# Altium PCB ble_seismometer.PcbDoc
Units mil, origin at the board's own origin, x right, y up, seen from the top; angles counter-clockwise.
Board outline 6000 x 4000 mil, 2 copper layers (Top Layer, Bottom Layer); 24 components, 21 nets, 108 pads, 0 vias.
Unrouted connection lines stored in the file: 14.
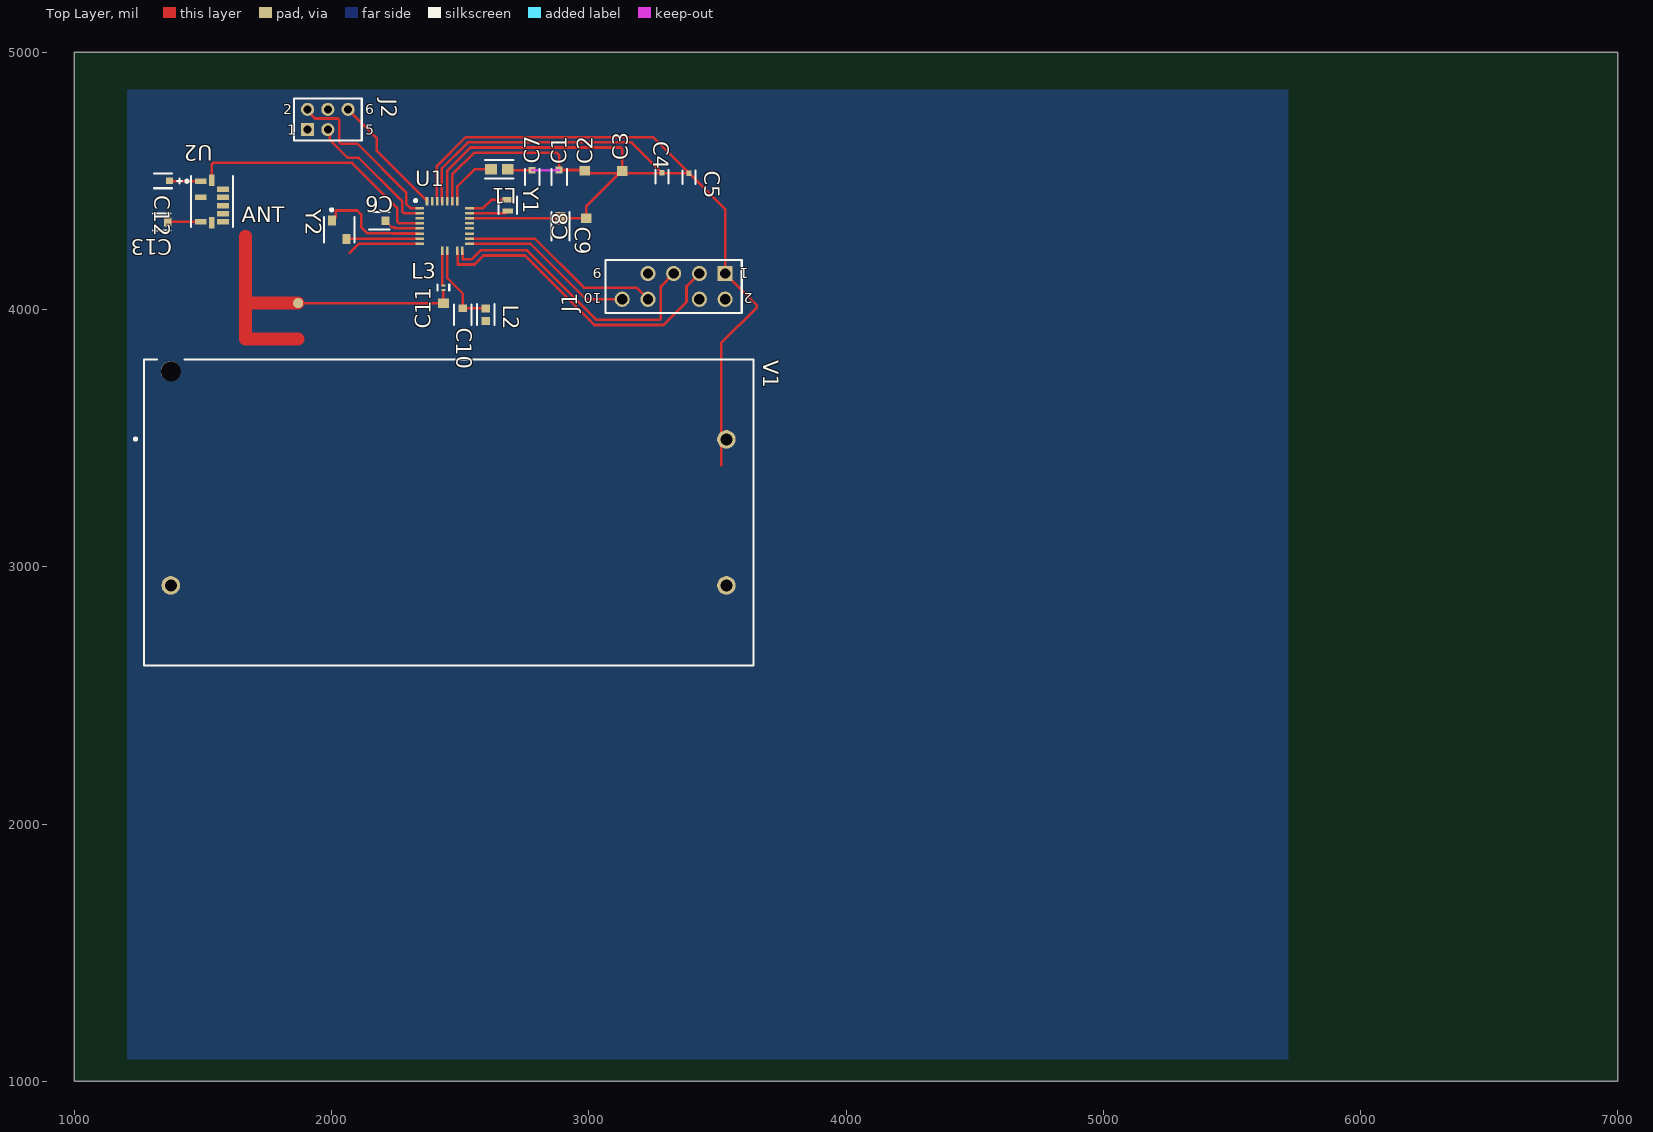
[diagram p0: Top Layer view]
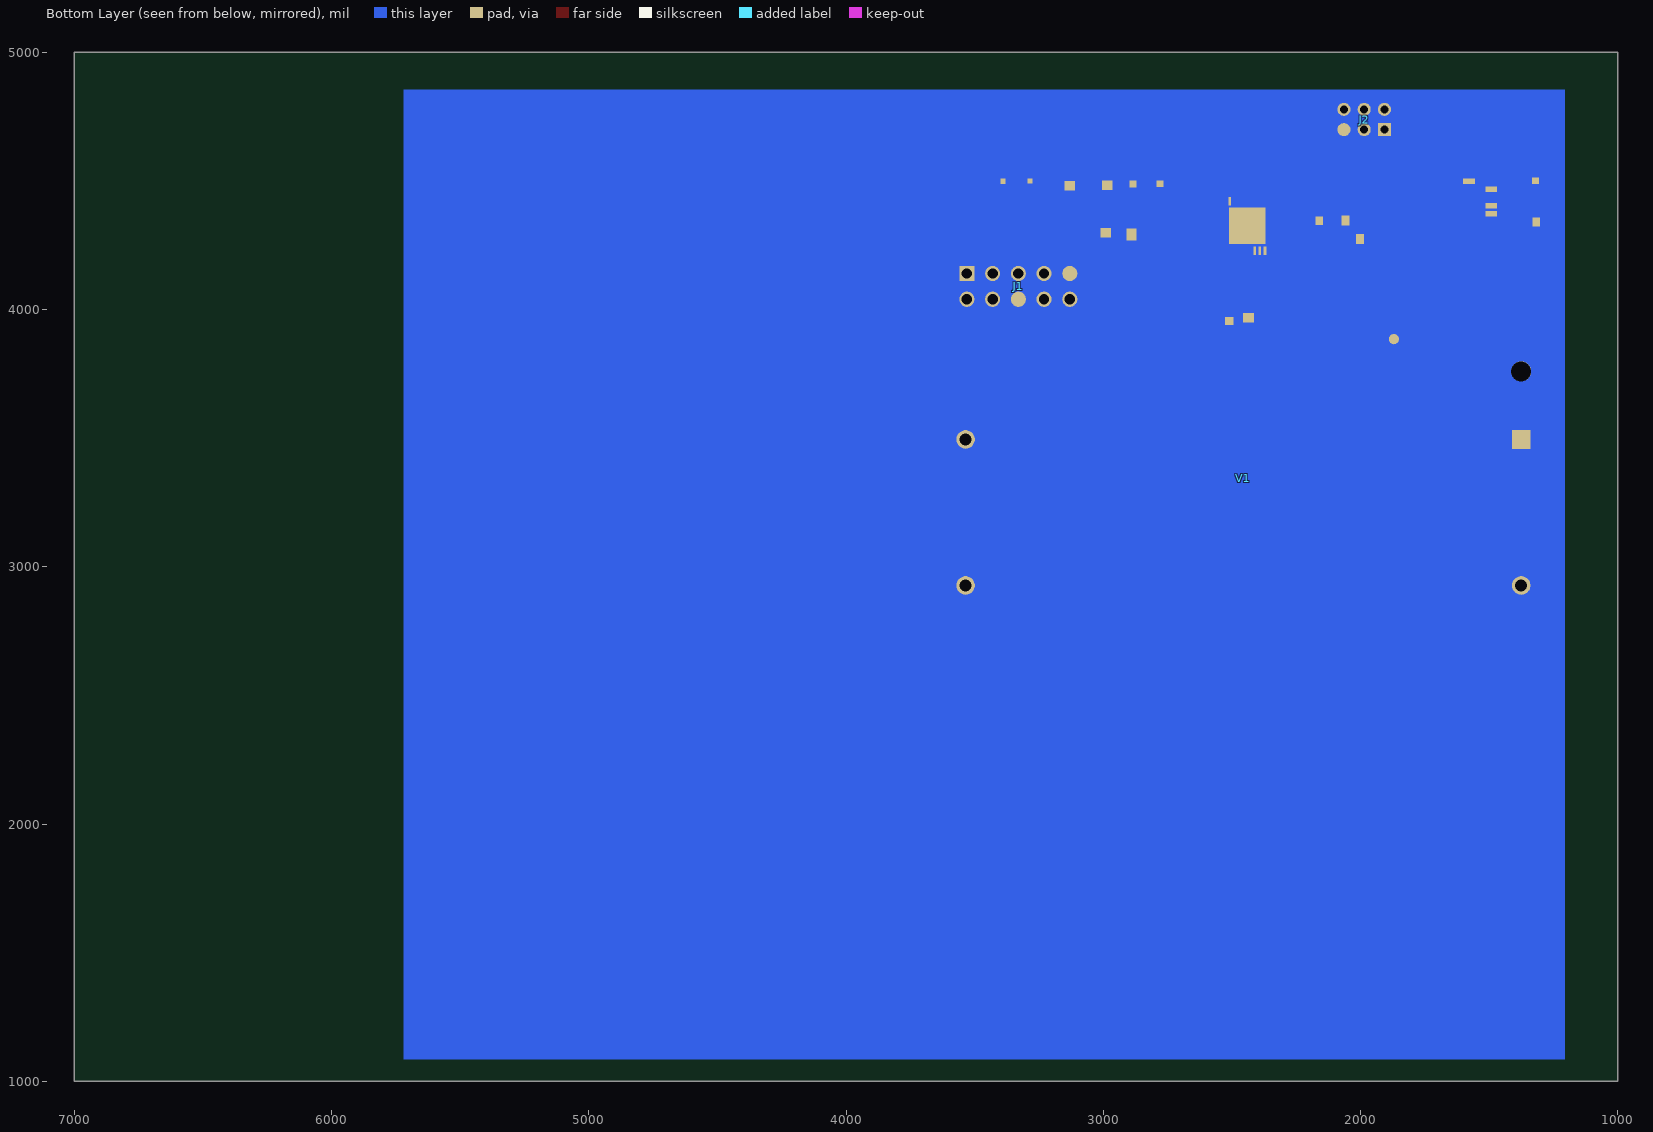
[diagram p1: Bottom Layer view, seen from below]
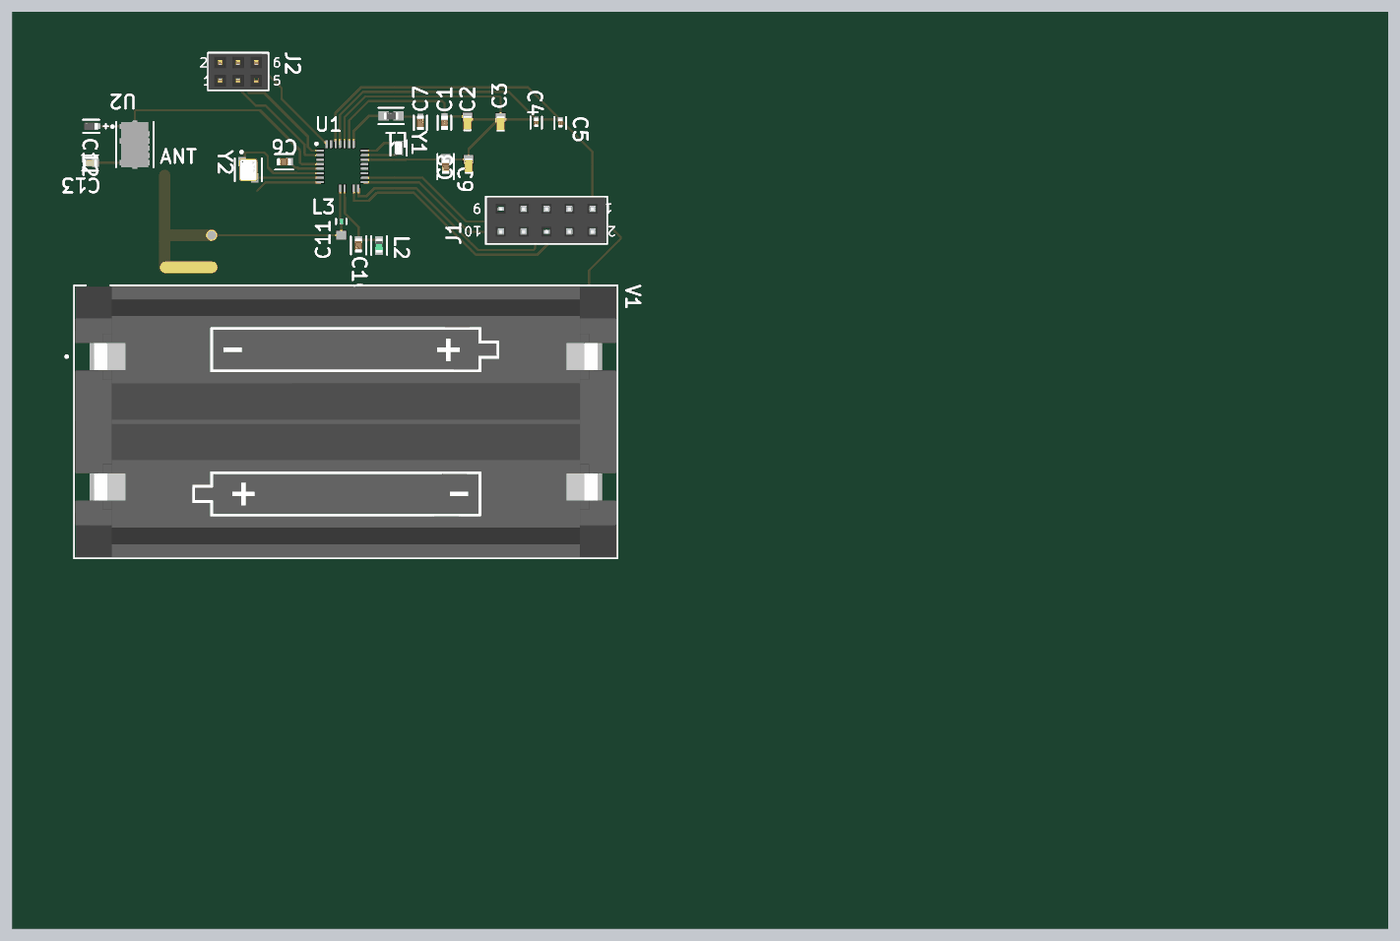
[diagram p2: 3D render of the assembled board from above, using the file's embedded part models]

## Layer stack, top to bottom
Top Solder: solder mask 0.4, Solder Resist, Dk 3.5
Top Layer: signal copper 1.4
Dielectric 1: dielectric 12.6, FR-4, Dk 4.8
Bottom Layer: signal copper 1.4
Bottom Solder: solder mask 0.4, Solder Resist, Dk 3.5

## Board outline
1000,1000 7000,1000 7000,5000 1000,5000

## Design rules (kind name [scope] priority, off if disabled: settings)
Clearance [All] p1: gap=10 ignorepadtopadclearanceinfootprint=FALSE except(0: Arc-Hole Track-Hole SMDPad-Hole THPad-Hole Via-Hole Fill-Hole Poly-Hole Region-Hole Text-Hole)
PolygonConnect [All] p1: connectstyle=Relief reliefconductorwidth=10 reliefentries=4 polygonreliefangle="90 Angle" airgapwidth=10
RoomDefinition ble_seismometer [InComponentClass('ble_seismometer')] p1: confinementstyle=ConfineIn formatcopy=TRUE lockcomponents=FALSE outline 1175,2525 3790,2525 3790,4945 1175,4945
RoutingVias [All] p1: holewidth=28 width=50 viastyle="Through Hole" minholewidth=28 minwidth=50 maxholewidth=28 maxwidth=50
SolderMaskExpansion [All] p1: expansion=4 istentingtop=FALSE
Width [All] p1: maxlimit=10 minlimit=10 preferedwidth=10
30 further rules are at their usual default settings.

## Components (designator, comment, footprint, x,y, rotation, side; value= is the part's Value field where it differs from the comment)
ANT "Inverted F Antenna" InvertedF-FOOTPRINT 1870,3885 r90 top net-tie
C1 "C1608X5R1A106K080AC" FP-C1608-080-0_1-MFG 2885,4515 r90 top
C2 "GRM188R71H104KA93D" CAPC1608X90X35ML10T15 2985,4511.46 r90 top
C3 "GRM188R71H104KA93D" CAPC1608X90X35ML10T15 3130,4510 r90 top
C4 "C0402C105K8PACTU" FP-C0402C105K8PACTU-MFG 3285,4515.75 r270 top
C5 "C0402C105K8PACTU" FP-C0402C105K8PACTU-MFG 3390,4514.25 r270 top
C6 "GRM188R71E224KA88D" FP-GRM188-0_1-e0_2_0_5-IPC_C 2185.33,4345 r180 top
C7 "GRM188R60J475KE19D" FP-GRM188-0_1-MFG 2780,4515 r90 top
C8 "GRM188R71H103KA01D" CAPC1608X90X35ML10T15 2990,4326.46 r90 top
C9 "GRM188R60J106ME47D" FP-GRM188-0_1-e0_2_0_55-IPC_A 2890,4323.43 r270 top
C10 "GRM188R71E224KA88D" FP-GRM188-0_1-e0_2_0_5-IPC_C 2510.33,3980.33 r270 top
C11 "VJ0603D1R5BXPAJ" CAPC1608X92X38ML15T08 2435,3996.46 r90 top
C12 "F981E105MMA" FP-F98M-MFG 1345,4500 r0 top value=1uF
C13 "C0603C104K5RACTU" FP-C0603C-CF-MFG 1340,4340 r180 top value="0.10 μF"
J1 "61301021821" 61301021821 3330,4090 r180 top
J2 "62000621821" 62000621821 1985.63,4738.74 r0 top
L1 "LQM18FN4R7M00D" FP-LQM18FN_00-IPC_A 2652.44,4545 r180 top
L2 "LQG18HN22NJ00D" FP-LQG18HH_00-IPC_C 2600,3980 r270 top
L3 "LQW03AW1N9C00D" FP-LQW03AW_00-MFG 2435,4085 r270 top
U1 "EFR32BG13P632F512GM32-D" EFR32BG13P632F512GM32-D 2440,4325 r0 top
U2 "ADXL345BCCZ-RL7" FP-CC-14-1-MFG 1535,4420 r0 top
V1 "1013" FP-1013-MFG 2455.08,3211.14 r0 top
Y1 "ABS05-32.768KHZ-T" FP-ABS05-MFG 2685,4405 r270 top
Y2 "ABM10-165-38.400MHZ-T3" FP-ABM10-165-MFG 2030,4310 r270 top

## Footprints (in the part's own frame and the unit in brackets; to place one, negate y for a bottom-side part, rotate by r counter-clockwise, add the part's x,y. Pads: shape width x height; smd on the part's side, far side on the other; paste and mask are expansions set on the pad)
61301021821 [mm] "Socket Header, Pitch 2.54 mm, THT, Vertical, dual row, 10p"
  rect 1.5x1.5 hole 1.02: 1(-5.08,-1.27)
  round 1.5 hole 1.02: 2(-5.08,1.27) 3(-2.54,-1.27) 4(-2.54,1.27) 5(0,-1.27) 7(2.54,-1.27) 8(2.54,1.27) 10(5.08,1.27)
  round 1.5 smd far side: 6(0,1.27) 9(5.08,-1.27)
  silkscreen extent -6.73,-2.62 6.73,2.62, body extent -6.6,-2.54 6.6,2.54, height 8.45
62000621821 [mm] "Socket Header, Pitch 2.00 mm, THT, Vertical, dual row, 6p"
  rect 1.3x1.3 hole 0.8: 1(-2,-1)
  round 1.3 hole 0.8: 2(-2,1) 3(0,-1) 4(0,1) 6(2,1)
  round 1.3 smd far side: 5(2,-1)
  silkscreen extent -3.35,-2.07 3.35,2.07, body extent -3.3,-2 3.3,2, height 4.35
CAPC1608X90X35ML10T15 [mm] "Chip Capacitor, 2-Leads, Body 1.7x0.9mm, IPC Low Density"
  rect 0.95x1.05 smd far side: 1(-0.725,0)
  rect 0.95x1.05 smd: 2(0.725,0)
  body extent -0.85,-0.45 0.85,0.45, height 0.9
CAPC1608X92X38ML15T08 [mm] "Chip Capacitor, 2-Leads, Body 1.60x0.80mm, IPC Low Density"
  rect 0.95x1.1 smd far side: 1(-0.725,0)
  rect 0.95x1.1 smd: 2(0.725,0)
  body extent -0.87,-0.48 0.87,0.47, height 0.92
EFR32BG13P632F512GM32-D [mm]
  rect 0.85x0.25 smd: 1(-2.45,1.75) 2(-2.45,1.25) 3(-2.45,0.75) 4(-2.45,0.25) 5(-2.45,-0.25) 6(-2.45,-0.75) 7(-2.45,-1.25) 8(-2.45,-1.75) 17(2.45,-1.75) 18(2.45,-1.25) 19(2.45,-0.75) 20(2.45,-0.25) 21(2.45,0.25) 22(2.45,0.75) 23(2.45,1.25) 24(2.45,1.75)
  rect 0.25x0.85 smd far side: 9(-1.75,-2.45) 10(-1.25,-2.45) 11(-0.75,-2.45) 25(1.75,2.45)
  rect 3.6x3.6 smd far side: 11(0,0)
  rect 0.25x0.85 smd: 12(-0.25,-2.45) 13(0.25,-2.45) 15(1.25,-2.45) 16(1.75,-2.45) 26(1.25,2.45) 27(0.75,2.45) 28(0.25,2.45) 29(-0.25,2.45) 30(-0.75,2.45) 31(-1.25,2.45) 32(-1.75,2.45)
  rect 0.25x0.85 on Mech1: 14(0.75,-2.45)
  silkscreen extent -3,2.38 -2.75,2.62
FP-1013-MFG [mm]
  rect 1.84x1.84 smd far side paste-1000 mask+0: 1(-27.43,7.21)
  round 1.84 hole 1.19 paste-1000 mask+0: 2(27.43,7.21) 3(-27.43,-7.21) 4(27.43,-7.21)
  round 1.98 hole 1.98 unplated paste-1000 mask+0: ""(-27.43,13.94)
  silkscreen extent -31.04,-15.11 30.09,15.11, body extent -30.19,-15.21 30.19,15.21, height 0.25
FP-ABM10-165-MFG [mm]
  rect 1x0.8 smd paste+0 mask+0: 1(-0.9,-0.7) 3(0.9,0.7)
  rect 1x0.8 smd far side paste+0 mask+0: 2(0.9,-0.7) 4(-0.9,0.7)
  silkscreen extent -2.1,-1.5 1.25,1.5, body extent -1.5,-1.2 1.5,1.2, height 0.25
FP-ABS05-MFG [mm]
  rect 0.5x1 smd paste+0 mask+0: 1(-0.55,0) 2(0.55,0)
  silkscreen extent -0.85,-0.9 0.85,0.9, body extent -0.95,-0.65 0.95,0.65, height 0.25
FP-C0402C105K8PACTU-MFG [mm]
  rect 0.52x0.52 smd paste+0 mask+0: 1(-0.4,0)
  rect 0.52x0.52 smd far side paste+0 mask+0: 2(0.4,0)
  silkscreen extent -0.67,-0.64 0.67,0.64, body extent -0.8,-0.4 0.8,0.4, height 0.25
FP-C0603C-CF-MFG [mm]
  rect 0.75x0.9 smd paste+0 mask+0: 1(-0.6,0)
  rect 0.75x0.9 smd far side paste+0 mask+0: 2(0.6,0)
  silkscreen extent -0.87,-0.85 0.88,0.85, body extent -1.2,-0.6 1.2,0.6, height 0.25
FP-C1608-080-0_1-MFG [mm]
  rect 0.7x0.7 smd far side paste+0 mask+0: 1(-0.7,0)
  rect 0.7x0.7 smd paste+0 mask+0: 2(0.7,0)
  silkscreen extent -0.8,-0.75 0.8,0.75, body extent -1.15,-0.55 1.15,0.55, height 0.25
FP-CC-14-1-MFG [mm]
  rect 1.145x0.55 smd paste+0 mask+0: 1(-1.098,2) 3(-1.098,0.4) 6(-1.098,-2) 8(1.098,-2) 9(1.098,-1.2) 10(1.098,-0.4) 11(1.098,0.4) 12(1.098,1.2)
  rect 1.145x0.55 smd far side paste+0 mask+0: 2(-1.098,1.2) 4(-1.098,-0.4) 5(-1.098,-1.2) 13(1.098,2)
  rect 0.55x1.145 smd paste+0 mask+0: 7(0,-2.097) 14(0,2.097)
  silkscreen extent -2.6,-2.5 2.07,2.5, body extent -2.17,-3.17 2.17,3.17, height 0.25
FP-F98M-MFG [mm]
  rect 0.7x0.65 smd far side paste+0 mask+0: 1(-0.65,0)
  rect 0.7x0.65 smd paste+0 mask+0: 2(0.65,0)
  silkscreen extent -0.9,-0.72 1.88,0.72, body extent -1.1,-0.63 1.1,0.63, height 0.25
FP-GRM188-0_1-e0_2_0_5-IPC_C [mil]
  rect 29.87x31.97 smd paste+0 mask+0: 1(-24.67,0)
  rect 29.87x31.97 smd far side paste+0 mask+0: 2(24.67,0)
  silkscreen extent -40,-33 40,33, body extent -44,-22 44,22, height 10
FP-GRM188-0_1-e0_2_0_55-IPC_A [mil]
  rect 47.57x39.85 smd paste+0 mask+0: 1(-31.57,0)
  rect 47.57x39.85 smd far side paste+0 mask+0: 2(31.57,0)
  silkscreen extent -55,-36 55,36, body extent -75,-40 75,40, height 10
FP-GRM188-0_1-MFG [mm]
  rect 0.65x0.7 smd far side paste+0 mask+0: 1(-0.675,0)
  rect 0.65x0.7 smd paste+0 mask+0: 2(0.675,0)
  silkscreen extent -0.8,-0.72 0.8,0.72, body extent -1.1,-0.55 1.1,0.55, height 0.25
FP-LQG18HH_00-IPC_C [mil]
  rect 31.73x33.79 smd paste+0 mask+0: 1(-24.65,0) 2(24.65,0)
  silkscreen extent -41,-34 41,34, body extent -44,-23 44,23, height 10
FP-LQM18FN_00-IPC_A [mil]
  rect 45.6x39.85 smd paste+0 mask+0: 1(-32.56,0) 2(32.56,0)
  silkscreen extent -55,-36 55,36, body extent -75,-40 75,40, height 10
FP-LQW03AW_00-MFG [mm]
  rect 0.21x0.4 smd paste+0 mask+0: 1(-0.22,0) 2(0.22,0)
  silkscreen extent -0.29,-0.58 0.29,0.58, body extent -0.43,-0.33 0.43,0.33, height 0.25
InvertedF-FOOTPRINT [mil]
  round 40 smd far side: 1(0,0)
  round 40 smd: 2(140,0)
  Top Layer lines w50: 0,205 400,205 ; 0,200 0,0 ; 140,200 140,0

## Part data
ANT: library part InvertedF
C1: library part CMP-2000-04979-3, "Multilayer Ceramic Capacitors 10μF ±10% 10V X5R SMD 0603", Capacitance=10uF, Case Code (Imperial)=0603, Case Code (Metric)=1608, Dielectric=X5R, Dielectric Material=Ceramic, Max Operating Temperature=85°C, Min Operating Temperature=-55°C, Package Quantity=1, Tolerance=10%, Voltage=10V, Case/Package=0603, Construction=Flat, Depth=0.8mm, Height=0.8mm, Lead Free="Lead Free", Length=1.6mm, Mount="Surface Mount", Number of Pins=2, Packaging="Tape and Reel", Radiation Hardening=No, REACH SVHC="No SVHC", Resistor Type=Ceramic, RoHS Compliant=Yes, Series=C, Termination=SMD/SMT, Thickness=0.035inch, Voltage Rating=10V, Voltage Rating (DC)=10V, Weight=7.1E-05oz, Width=0.8mm
C2 C3: library part CMP-2100-03643-1, "Chip Capacitor, 0.1 uF, +/- 10%, 50 V, -55 to 125 degC, 0603 (1608 Metric), RoHS, Tape and Reel", Capacitance=100nF, Case Code (Imperial)=0603, Case Code (Metric)=1608, Dielectric=X7R, Dielectric Material=Ceramic, Insulation Resistance=10GR, Manufacturer=Murata, Max Operating Temperature=125degC, Min Operating Temperature=-55degC, Package Description="2-Pin Surface Mount Device, Body 1.6 x 0.8 mm", Package Quantity=1, Tolerance=10%, Voltage=50V, Case/Package=0603, Contact Plating=Tin, Datasheet URL=http://psearch.en.murata.com/capacitor/product/GRM188R71H104KA93%23.pdf, Datasheet Version=42675.0, Depth=0.8mm, Height=0.8mm, Lead Free=LeadFree, Length=1.6mm, Manufacturer URL=http://www.murata.com/, Material=Ceramic, Mount=SurfaceMount, Number of Pins=2, Package Reference=0603, Packaging=TapeandReel, Radiation Hardening=No, REACH SVHC=NoSVHC, RoHSCompliant=true, Termination=SMD/SMT, Thickness=0.035inch, Voltage Rating=50V, Voltage Rating (DC)=50V, Width=0.8mm
C4 C5: library part CMP-2008-02081-2, "CAP CER 1UF 10V X5R 0402", Capacitance=1uF, Case Code (Imperial)=0402, Case Code (Metric)=1005, Dielectric=X5R, Dielectric Material=Ceramic, Max Operating Temperature=85°C, Min Operating Temperature=-55°C, Package Quantity=1, Tolerance=10%, Voltage=10V, Case/Package=0402, Construction=Flat, Contact Plating=Tin, Depth=0.5mm, Dissipation Factor=5%, Height=0.5mm, Lead Free="Lead Free", Length=1mm, Mount="Surface Mount", Number of Pins=2, Packaging="Tape and Reel", Radiation Hardening=No, REACH SVHC="No SVHC", RoHS Compliant=Yes, Series=C, Termination=SMD/SMT, Thickness=0.022inch, Voltage Rating=10V, Voltage Rating (DC)=10V, Width=0.5mm
C6 C10: library part CMP-1035-02648-3, "Chip Multilayer Ceramic Capacitors for General Purpose, 0603, 0.22uF, X7R, 15%, 10%, 25V", Capacitance=220nF, Case Code (Imperial)=0603, Case Code (Metric)=1608, Dielectric=X7R, Max Operating Temperature=125°C, Min Operating Temperature=-55°C, Package Quantity=1, Tolerance=10%, Voltage=50V, Voltage Rating=25V, Case/Package=0603, Depth=0.8mm, Height=0.8mm, Lead Free="Lead Free", Length=1.6mm, Material=Ceramic, Mount="Surface Mount", Number of Pins=2, Packaging="Tape and Reel", Radiation Hardening=No, REACH SVHC="No SVHC", Termination=SMD/SMT, Thickness=0.035inch, Voltage Rating (DC)=25V, Width=0.8mm
C7: library part CMP-2006-02799-3, "CAP CER 4.7UF 6.3V X5R 0603", Capacitance=4.7uF, Case Code (Imperial)=0603, Case Code (Metric)=1608, Dielectric=X5R, Max Operating Temperature=85°C, Min Operating Temperature=-55°C, Package Quantity=1, Tolerance=10%, Voltage=6.3V, Case/Package=0603, Depth=0.8mm, Height=0.8mm, Lead Free="Lead Free", Length=1.6mm, Material=Ceramic, Mount="Surface Mount", Packaging="Tape and Reel", Radiation Hardening=No, REACH SVHC="No SVHC", RoHS Compliant=Yes, Termination=SMD/SMT, Thickness=0.035inch, Voltage Rating=6.3V, Voltage Rating (DC)=6.3V, Width=0.8mm
C8: library part CMP-2100-03642-1, "Chip Capacitor, 10 nF, +/- 10%, 50 V, -55 to 125 degC, 0603 (1608 Metric), RoHS, Tape and Reel", Capacitance=10nF, Case Code (Imperial)=0603, Case Code (Metric)=1608, Dielectric=X7R, Dielectric Material=Ceramic, Insulation Resistance=10GR, Manufacturer=Murata, Max Operating Temperature=125degC, Min Operating Temperature=-55degC, Package Description="2-Pin Surface Mount Device, Body 1.6 x 0.8 mm", Package Quantity=1, Tolerance=10%, Voltage=50V, Case/Package=0603, Datasheet URL=http://search.murata.co.jp/Ceramy/image/img/A01X/G101/ENG/GRM188R71H103KA01-01.pdf, Datasheet Version=42401.0, Depth=0.8mm, Height=0.8mm, Lead Free=LeadFree, Length=1.6mm, Manufacturer URL=http://www.murata.com/, Material=Ceramic, Mount=SurfaceMount, Number of Pins=2, Package Reference=0603, Packaging=TapeandReel, REACH SVHC=Unknown, RoHSCompliant=True, Termination=SMD/SMT, Thickness=0.035inch, Voltage Rating=50V, Voltage Rating (DC)=50V, Width=0.031inch
C9: library part CMP-2006-02792-2, "Chip Multilayer Ceramic Capacitors for General Purpose, 0603, 10uF, X5R, 15%, 20%, 6.3V", Capacitance=10uF, Case Code (Imperial)=0603, Case Code (Metric)=1608, Dielectric=X5R, Max Operating Temperature=85°C, Min Operating Temperature=-55°C, Package Quantity=4000, Tolerance=20%, Voltage=6.3V, Case/Package=0603, Depth=0.8mm, Height=0.8mm, Lead Free="Lead Free", Length=1.6mm, Material=Ceramic, Mount="Surface Mount", Packaging="Tape and Reel", Radiation Hardening=No, REACH SVHC="No SVHC", Termination=SMD/SMT, Thickness=0.035inch, Voltage Rating=6.3V, Voltage Rating (DC)=6.3V, Width=0.031inch
C11: library part CMP-2006-01499-1, Manufacturer=Vitramon, Part Number=VJ0603D1R5BXPAJ
C12: library part CMP-04424-000025-1, "CAP TANT 1UF 20% 25V 0603", Capacitance=1uF, Leakage Current=0.5uA, Manufacturer=AVX, Package=F98M, Ripple Current=50mA, Temperature="-55°C to +125°C", Temperature Coefficient=30%, Temperature Range High=+125°C, Temperature Range Low=-55°C, Tolerance=20%, Voltage Rating=25V, Automotive=No, Category=Cap, ComponentLink2Description=Datasheet, ComponentLink2URL=http://datasheets.avx.com/F98.pdf, Device Class L1="Passive Components", Device Class L2=Capacitors, Device Class L3="Tantalum Capacitors", Digikey Description="CAP TANT 1UF 20% 25V 0603", Dissipation Factor=8%, Esr=10Ω, Footprint Url=https://www.avx.com/download/software/literature/AVX-Footprint-Library.pdf, Height=0.9mm, Lead Free=Yes, Life=1000Hours, Manufacturer Part Number=F981E105MMA, Material=Tantalum, Mouser Description="Tantalum Capacitors - Solid SMD 1uF 25V 20% 0603,1.6x0.85x0.65mm", Octopart=https://octopart.com/f981e105mma-avx-27552246, RoHS=TRUE
C13: library part CMP-2006-03061-2, "CAP CER 0.1UF 50V X7R 0603", Capacitance="0.10 μF", Manufacturer=KEMET, Package=C0603C-CF, Temperature="-55°C to +125°C", Temperature Characteristic=X7R, Temperature Coefficient=30ppm/°C, Temperature Range High=+125°C, Temperature Range Low=-55°C, Tolerance=0.1, Voltage Rating="50 V", Automotive=Yes, Automotive Grade="Grade 1", Category=Cap, ComponentLink2Description=Datasheet, ComponentLink2URL=https://api.kemet.com/component-edge/download/datasheet/C0603C100J5GACAUTO.pdf, Device Class L1="Passive Components", Device Class L2=Capacitors, Device Class L3="Ceramic Capacitors", Digikey Description="CAP CER 0.1UF 50V X7R 0603", Height=0.87mm, Lead Free=Yes, Manufacturer Part Number=C0603C104K5RACTU, Material=Ceramic, Octopart=https://octopart.com/c0603c104k5ractu-kemet-139244, RoHS=TRUE
J1: library part CMP-1502-01334-1, "THT Vertical Socket Header WR-PHD, Pitch 2.54 mm, Dual Row, 10 pins", Contact Resistance=20mOhm, Manufacturer="Wurth Elektronik", Operating Temperature=-40to125degC, Rated Current=3A, Withstanding Voltage=500VAC, Working Voltage=250VAC, Datasheet URL=https://katalog.we-online.de/em/datasheet/6130xx21821.pdf, Gender=Female, Manufacturer URL=http://www.we-online.de, Mounting Technology=THT, Orientation=Vertical, Package Reference=61301021821, Packaging=Tray, Part Number=61301021821, Pin Number=10, Pitch=2.54mm, Publisher=WurthElektronik, Row Number=Dual
J2: library part CMP-1502-01207-1, "THT Vertical Socket Header WR-PHD, Pitch 2.00 mm, Dual Row, 6 pins", Contact Resistance=20mOhm, Manufacturer="Wurth Elektronik", Operating Temperature=-40to105degC, Rated Current=2A, Withstanding Voltage=500VAC, Working Voltage=250VAC, Datasheet URL=https://katalog.we-online.de/em/datasheet/62000621821.pdf, Gender=Female, Manufacturer URL=http://www.we-online.de, Mounting Technology=THT, Orientation=Vertical, Package Reference=62000621821, Packaging=Tube, Part Number=62000621821, Pin Number=6, Pitch=2.00mm, Publisher=WurthElektronik, Row Number=Dual
L1: library part CMP-06042-016387-1, "FIXED IND 4.7UH 80MA 600 MOHM", Case Code (Imperial)=0603, Case Code (Metric)=1608, Current Rating=80mA, DC Resistance (DCR)=600mR, Inductance=4.7uH, Max Operating Temperature=125°C, Min Operating Temperature=-55°C, Package Quantity=4000, Self Resonant Frequency=50MHz, Test Frequency=1MHz, Tolerance=20%, Case/Package=0603, Core Material=Ferrite, DC Current=80mA, Depth=0.9mm, Height=0.8mm, Height - Seated (Max)=0.035inch, Lead Free="Lead Free", Length=1.6mm, Max DC Current=80mA, Military Standard=Not, Mount="Surface Mount", Packaging="Tape and Reel", Radiation Hardening=No, Rated Current-Max=80mA, RoHS Compliant=Yes, Saturation Current=80mA, Series=LQM18F, Shielding=Shielded, Termination=SMD/SMT, Weight=7.1E-05oz, Width=0.031inch
L2: library part CMP-06042-016460-1, "Multilayer type RF Inductor 22nH ±5% 0.5Ω 500mA 0603", Case Code (Imperial)=0603, Case Code (Metric)=1608, Current Rating=300mA, DC Resistance (DCR)=500mR, Inductance=22nH, Inductance Tolerance=5%, Max Operating Temperature=85°C, Min Operating Temperature=-40°C, Package Quantity=4000, Self Resonant Frequency=2.3GHz, Test Frequency=100MHz, Case/Package=0603, Core Material=Air, DC Current=300mA, Depth=0.95mm, Height=0.8mm, Height - Seated (Max)=0.037inch, Lead Free="Lead Free", Length=1.6mm, Max DC Current=300mA, Military Standard=Not, Mount="Surface Mount", Packaging="Tape and Reel", Q Factor=12, Radiation Hardening=No, REACH SVHC="No SVHC", RoHS Compliant=Yes, Series=LQG18H, Shielding=Unshielded, Termination=SMD/SMT, Tolerance=5%, Width=0.031inch
L3: library part CMP-06042-002256-1, "Wire Wound RF Inductor 1.9nH ±0.2nH 620mA 0.08Ω 0201 (0603)", Case/Package=Nonstandard, Current Rating=620mA, DC Resistance (DCR)=80mR, Inductance=1.9nH, Max Operating Temperature=125°C, Min Operating Temperature=-55°C, Resistor Type=Wirewound, Self Resonant Frequency=19GHz, Test Frequency=100MHz, Mount="Surface Mount", Packaging="Tape and Reel", Shielding=Unshielded
U1: "RF System on a Chip - SoC Blue Gecko BLE SoC QFN48 2.4 G 10 dB BLE/proprietary 512 kB 64 kB (RAM) 16GPIO", Manufacturer_Name="Silicon Labs", Mouser Part Number=634-BGP632F512GM32D, Datasheet Link=https://www.silabs.com/documents/public/data-sheets/efr32bg13-datasheet.pdf, Geometry.Height=0.9mm, Manufacturer_Part_Number=EFR32BG13P632F512GM32-D, Mouser Price/Stock=https://www.mouser.co.uk/ProductDetail/Silicon-Labs/EFR32BG13P632F512GM32-D?qs=EBDBlbfErPzhsDxvdSLfmw%3D%3D
U2: library part CMP-0885-00033-2, "ACCEL 2-16G I2C/SPI 14LGA", Case/Package=LGA, Max Operating Temperature=85°C, Max Supply Voltage=3.6V, Min Operating Temperature=-40°C, Min Supply Voltage=2V, Nominal Supply Current=140uA, Operating Supply Current=145uA, Package Quantity=1, -3db Bandwidth=1.6kHz, Axis="X, Y, Z", Bandwidth=0.05Hz, Depth=3mm, Lead Free="Contains Lead", Length=5mm, Number of Pins=14, Output Type=Digital, Packaging="Tape and Reel", Radiation Hardening=No, Sensitivity=256LSB/g
V1: library part CMP-19636-000024-1, "BATTERY HOLDER AA 2 CELL PC PIN", Color=Black, Max Operating Temperature=145°C, Min Operating Temperature=-50°C, Package Quantity=1, Contact Plating=Nickel, Lead Free="Lead Free", Material=Nylon, Mount="Through Hole", Number of Batteries=2, Number of Cells=2, Packaging=Tray, REACH SVHC="No SVHC", Series=-, Termination="PC Pin"
Y1: library part CMP-27762-008890-2, "Crystal 32.768kHz ±20ppm (Tol) 12.5pF FUND 90kΩ 2-Pin SMD T/R", Case/Package=CSMD, ESR (Equivalent Series Resistance)=90kR, Frequency=32.768kHz, Frequency Tolerance=20ppm, Load Capacitance=12.5pF, Max Operating Temperature=85°C, Min Operating Temperature=-40°C, Operating Frequency="32.768 kHz", Package Quantity=3000, Depth=1mm, Height=0.5mm, Lead Free="Lead Free", Length=1.6mm, Mount="Surface Mount", Number of Pins=2, Packaging="Tape and Reel", Radiation Hardening=No, REACH SVHC="No SVHC", RoHS Compliant=Yes, Series=ABS05, Series Resistance=90kR, Termination=SMD/SMT, Tolerance=20ppm, Width=1mm
Y2: library part CMP-27762-010013-1, "CRYSTAL 38.4000MHZ 10PF SMD", Case/Package=SMD/SMT, ESR (Equivalent Series Resistance)=40R, Frequency=38.4MHz, Frequency Stability=20ppm, Load Capacitance=10pF, Max Operating Temperature=85°C, Min Operating Temperature=-30°C, Height=0.02inch, Length=0.098inch, Mount="Surface Mount", Packaging="Tape and Reel", RoHS Compliant=Yes, Width=0.079inch

## Nets (pads, with @x,y where several pads share a name; then routed paths per layer and width w, separated by ;. In a path a pad name is that pad's centre, name@x,y a point inside that pad or via, vN(x,y) a via of type N, cw(c..) or ccw(c..) an arc to the next point about the centre after c; other vN are vias at no path point)
A0: J1.10 U1.17 | length 684.4
  Top Layer w10: U1.17@2535,4255.79 2774.21,4255.79 2990,4040 J1.10
A1: J1.8 U1.18 | length 791.2
  Top Layer w10: U1.18 2790,4275.79 2980.79,4085 3185,4085 J1.8
D14: J1.3 U1.15 | length 1238.7
  Top Layer w10: U1.15 2490.16,4228.54 2490.16,4175 2555,4175 2590,4210 2751.72,4210 3021.72,3940 3290,3940 3380,4030 3380,4090 J1.3
GND: C1.1 C2.1 C3.1 C4.2 C5.2 C6.2 C7.1 C8.1 C9.2 C10.2 C11.1 J1.6 J1.9 J2.5 U1.9 U1.10 U1.11 U1.25 U2.2 U2.4 U2.5 V1.1 Y2.2 Y2.4
NetANT_IN: ANT.2 C11.2 L3.2 | length 615.2
  Top Layer w10: ANT.2 C11.2 L3.2@2435,4075 ; 2430,4228.39 2430.16,4228.54
NetC4_1: C4.1 U1.29 | length 1074.4
  Top Layer w10: U1.29@2429.21,4421.54 2429.21,4549.21 2530,4650 3166.5,4650 C4.1 ; U1.29@2430.08,4421.54 U1.29
NetC10_1: C10.1 L2.1 U1.13 | length 338.4
  Top Layer w10: U1.13 2449.84,4190.8 2450.16,4190.48 2450.16,4121.56 2510.33,4061.39 C10.1 2599.65,4005 L2.1
NetJ2_2: J2.2 U1.1 | length 354.5
  Top Layer w10: 2030,4650.86 2030,4736.68 ; 2100,4645 2290,4455
NetJ2_3: J2.3 U1.8 | length 402.9
  Top Layer w10: J2.3 1993.51,4691.49 1993.51,4659.06 2062.57,4590 2105,4590 2260,4435
NetJ2_6: J2.6 U1.32 | length 483.7
  Top Layer w10: J2.6 2175,4667.48 2175,4617.56 U1.32
NetL1_2: L1.2 U1.26 | length 227.1
  Top Layer w10: U1.26@2489.21,4410 U1.26 2489.21,4479.21 2555,4545 L1.2
NetL3_1: L3.1 U1.12 | length 134.9
  Top Layer w10: L3.1@2430.16,4093.66 U1.12
NetU1_2: U1.2 | length 132.1
  Top Layer w10: 2260,4435 2275,4420 2275,4380.07 2280.86,4374.21 U1.2
NetU1_4: U1.4 U2.14 | length 539.1
  Top Layer w10: 1540.86,4570 2080,4570
NetU1_6: U1.6 Y2.1 | length 437.1
  Top Layer w10: Y2.1@2004.88,4345.87 2015.63,4356.61 2015.63,4384.77 2015.86,4385 2100,4385 2115,4370 2115,4320.86 2140.07,4295.79 2240.67,4295.79 ; 2240.67,4295.47 U1.6
NetU1_7: U1.7 Y2.3 | length 283.9
  Top Layer w10: Y2.3@2060,4275 2060.79,4275.79 U1.7
NetU1_14: U2.13
NetU1_23: U1.23 Y1.2 | length 152.3
  Top Layer w10: U1.23 2675.87,4374.21 Y1.2
NetU1_24: U1.24 Y1.1 | length 162.1
  Top Layer w10: U1.24 2588.9,4393.9 2621.65,4426.65 Y1.1
NetU1_31: U1.31 U2.7
VBAT: C1.2 C2.2 C3.2 C5.1 C6.1 C7.2 C8.2 C9.1 C12.2 C13.1 J1.1 J2.1 L1.1 L2.2 U1.5 U1.22 U1.27 U1.28 U1.30 U2.1 U2.6 V1.2 | length 5772.7
  Top Layer w10: C13.1@1365,4330 1365,4331.5 1374.76,4341.26 U2.6 ; C12.2 1371.22,4499.37 1491.16,4499.37 U2.1 ; C6.1 2210,4343.95 2234.08,4319.87 2244.87,4319.87 2249.27,4315.47 U1.5@2343.54,4315.47 ; U1.30@2409.21,4435 2409.21,4557.5 2521.72,4670 2525,4670 3250,4670 C5.1 ; U1.28@2449.21,4421.46 2449.21,4539.21 2540,4630 3124.14,4630 3130,4624.14 C3.2 3128.03,4538.54 C3.2@3119.49,4530 ; U1.27@2469.21,4410 2469.21,4524.21 2555,4610 2875,4610 2885,4600 C1.2 2982.44,4542.56 C2.2 ; U1.22@2525,4354.21 2716.96,4354.21 2717.75,4355 C9.1 C8.2 2990,4400.51 C3.2@3119.49,4530 ; L1.1 2688.43,4541.57 C7.2 ; C2.2@2985,4530 C3.2@3119.49,4530 ; 3514.92,3393.86 3514.92,3869.92 3653.36,4008.36 3653.36,4016.64 J1.1 3530,4390 C5.1 ; C3.2@3119.49,4530 C5.1
pads on no net: ANT.1 C12.1 C13.2 J1.2 J1.4 J1.5 J1.7 J2.4 U1.3 U1.14 U1.16 U1.19 U1.20 U1.21 U2.3 U2.8 U2.9 U2.10 U2.11 U2.12 V1. V1.3 V1.4
copper on no net: | length 2225.7
  Top Layer w10: 1535,4502.58 1535,4564.14 1540.86,4570 ; 2030,4650.86 2035.86,4645 2100,4645 ; 2030,4736.68 2024.14,4742.54 1935,4742.54 ; 2070,4220 2105,4255 2343.54,4255 ; 2080,4570 2255,4395 2255,4342.37 2261.9,4335.47 2343.54,4335.47 ; 2290,4455 2290,4410 2306.1,4393.9 2343.54,4393.9 ; 2510.16,4228.54 2510.16,4195 2545,4195 2580,4230 2760,4230 3030,3960 3274.14,3960 3280,3965.86 3280,4090 3330,4140 ; 1935,4742.54 1910,4770 1935,4742.54

## Keep-outs
Top Layer:
  lines w10: 2780,4541.57 2884.02,4541.57

## Other copper
Bottom Layer:
  rectangle net GND: 1205,1085 5720,4855

## Text inside footprints (layer, text, board x,y; h text height)
J1: Top Overlay "1" at 3621.73,4160.87 h40 r180; Top Overlay "2" at 3637.48,4062.44 h40 r180; Top Overlay "10" at 3050.08,4062.44 h40 r180; Top Overlay "9" at 3050.08,4160.87 h40 r180
J2: Top Overlay "2" at 1812.4,4758.43 h40; Top Overlay "1" at 1828.15,4679.69 h40; Top Overlay "5" at 2131.3,4679.69 h40; Top Overlay "6" at 2131.3,4758.43 h40